# EAGLE board photoboard2a (EAGLE 7.5.0)
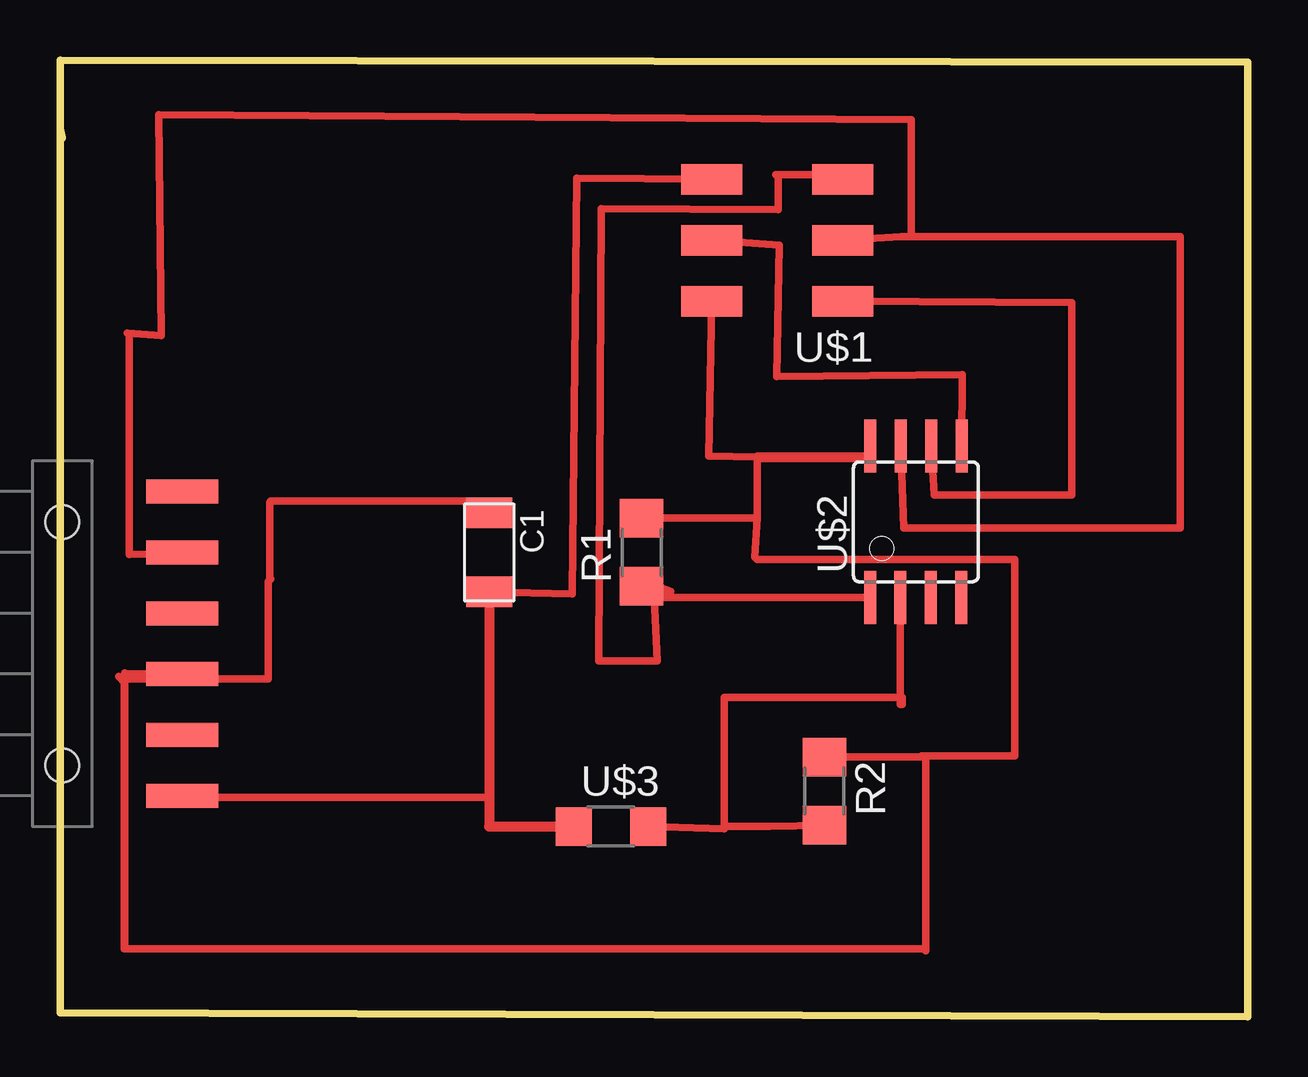
[diagram p0: board, top side]

Size 49.48 x 39.88 mm. Coordinates in mm from the lower left corner, seen from the top.
Outline: 0,36.98 0,0.15 49.48,0 49.48,39.78 0,39.88 0,36.98
Outline: 0,36.98 0.1,36.63
Copper layers (1*16): Top 0.035mm / dielectric 1.5mm / Bottom 0.035mm
Design rules "default": minimum track width 10mil, minimum drill 24mil, track to track 8mil, track to pad 8mil, pad to pad 8mil, via to via 8mil, smd to smd 8mil, copper to edge 40mil, drill to drill 8mil, minimum pad ring 10mil, minimum via ring 8mil, stop-mask expansion 4mil, vias tented up to drill 0mil, thermal gap 10mil
Net classes: 0 default: clearance 0.205 mm

## Footprints (pad centres in the part's own frame; a part is rotated, then mirrored left to right if it is on the bottom)
C1206FAB = smd 1.27 x 1.905: 1 -1.651,0; 2 1.651,0
1X06-SMD = smd 1 x 3: 1 -6.35,5; 2 -3.81,5; 3 -1.27,5; 4 1.27,5; 5 3.81,5; 6 6.35,5 | hole 1.4: -5.08,0; 5.08,0
R1206 = smd 1.6 x 1.803: 1 -1.422,0; 2 1.422,0
2X03SMD = smd 2.54 x 1.27: 1 -2.54,2.54; 2 2.92,2.54; 3 -2.54,0; 4 2.92,0; 5 -2.54,-2.54; 6 2.92,-2.54
SOIC8 = smd 0.5 x 2.2: 1 -1.905,-3.154; 2 -0.645,-3.154; 3 0.625,-3.154; 4 1.895,-3.154; 5 1.905,3.154; 6 0.635,3.154; 7 -0.635,3.154; 8 -1.905,3.154
OP1206 = smd 1.5 x 1.6: COLLECTOR -1.55,0; EMITTER 1.55,0

## Placement (x,y rotation side)
C1  1UF  [C1206FAB]  17.88,19.35 270 top
JP1  [1X06-SMD]  0.1,15.54 270 top
R1  10k  [R1206]  24.23,19.35 90 top
R2  499  [R1206]  31.85,9.4 270 top
U$1  AVRISPSMD  [2X03SMD]  30.07,32.36 180 top
U$2  ATTINY45SI  [SOIC8]  35.66,20.62 0 top
U$3  PHOTOTRANSISTOR-NPN1206  [OP1206]  22.96,7.92 0 top

## Library data of the parts
C1 R1 R2 U$1-U$3 = fab
JP1 = SparkFun

## Nets
CTS: JP1.5
GND: C1.2 JP1.6 U$1.6 U$3.COLLECTOR
GRD: U$2.4
MISO: U$1.1 U$2.6
MOSI: U$1.4 U$2.5
PB3: R2.2 U$2.2 U$3.EMITTER
RST: R1.1 U$1.5 U$2.1
RTS: JP1.1
RX: JP1.2 U$1.3 U$2.7
TX: JP1.3
VCC: C1.1 JP1.4 R1.2 R2.1 U$1.2 U$2.8

## Tracks (layer width: path | path; a pad name or v marks a point on that pad's centre or on a via)
GND
  Top 0.305: C1.2 21.34,17.63 21.54,34.95 U$1.6 | JP1.6 5.15,9.14 17.88,9.14
  Top 0.406: C1.2 17.88,9.14 17.88,7.92 U$3.COLLECTOR
MISO
  Top 0.305: U$1.1 42.16,29.77 42.16,21.74 36.42,21.74 U$2.6
MOSI
  Top 0.305: U$1.4 29.97,32.16 29.87,26.67 37.59,26.77 U$2.5
PB3
  Top 0.305: R2.2 29.57,7.92 27.69,7.92 | 27.69,7.92 27.69,7.82 U$3.EMITTER | 27.69,7.92 27.69,13.31 35.1,13.31 35.1,13 35.02,13 U$2.2
RST
  Top 0.305: U$2.1 24.23,17.47 R1.1 24.89,17.93 25.45,17.73 24.59,17.73 24.74,17.88 | 24.74,17.88 24.89,18.03 | 24.74,17.88 24.89,14.83 22.45,14.83 22.56,33.68 29.92,33.63 29.92,35 29.82,35.1 32.41,35.1 U$1.5
RX
  Top 0.305: U$1.3 35.05,32.51 35.46,32.51 | JP1.2 5.64,19.3 2.9,19.25 2.9,28.4 2.79,28.5 4.22,28.4 4.11,37.59 35.46,37.39 35.46,32.51 | 35.46,32.51 46.69,32.51 46.69,20.37 35.15,20.37 U$2.7
VCC
  Top 0.254: 24.23,20.94 R1.2 | 17.88,20.94 C1.1 | 5.18,14.27 JP1.4
  Top 0.305: U$1.2 27.03,23.37 29.06,23.32 29.06,20.94 29.05,20.79 | 29.05,20.79 28.96,19.15 29.06,19.05 39.78,19.05 39.78,10.87 35.92,10.87 | C1.1 17.98,21.11 17.98,21.49 8.79,21.49 8.74,21.44 8.74,18.29 8.79,18.24 8.69,18.14 8.69,14.07 5.69,14.07 5.69,14.38 5.1,14.38 JP1.4 2.79,14.27 2.69,14.17 2.69,14.07 | 35.92,10.87 36.07,10.72 36.07,2.74 35.98,2.83 2.67,2.83 | 2.44,14.17 2.67,13.94 2.67,2.83 | 2.67,2.83 2.69,2.86 2.69,14.07 | 5.28,14.33 5.03,14.07 2.74,14.07 | 2.69,14.07 2.74,14.07 | 2.74,14.07 2.69,14.12 2.69,14.33 | 24.23,20.94 24.39,20.79 29.05,20.79 | 35.92,10.87 35.86,10.82 R2.1
  Top 0.406: 29.06,23.32 33.76,23.32 U$2.8